# Altium PCB pmu.PcbDoc
Units mil, origin at the board's own origin, x right, y up, seen from the top; angles counter-clockwise.
Board outline 1870 x 900 mil, 2 copper layers (Top Layer, Bottom Layer); 14 components, 9 nets, 38 pads, 0 vias.
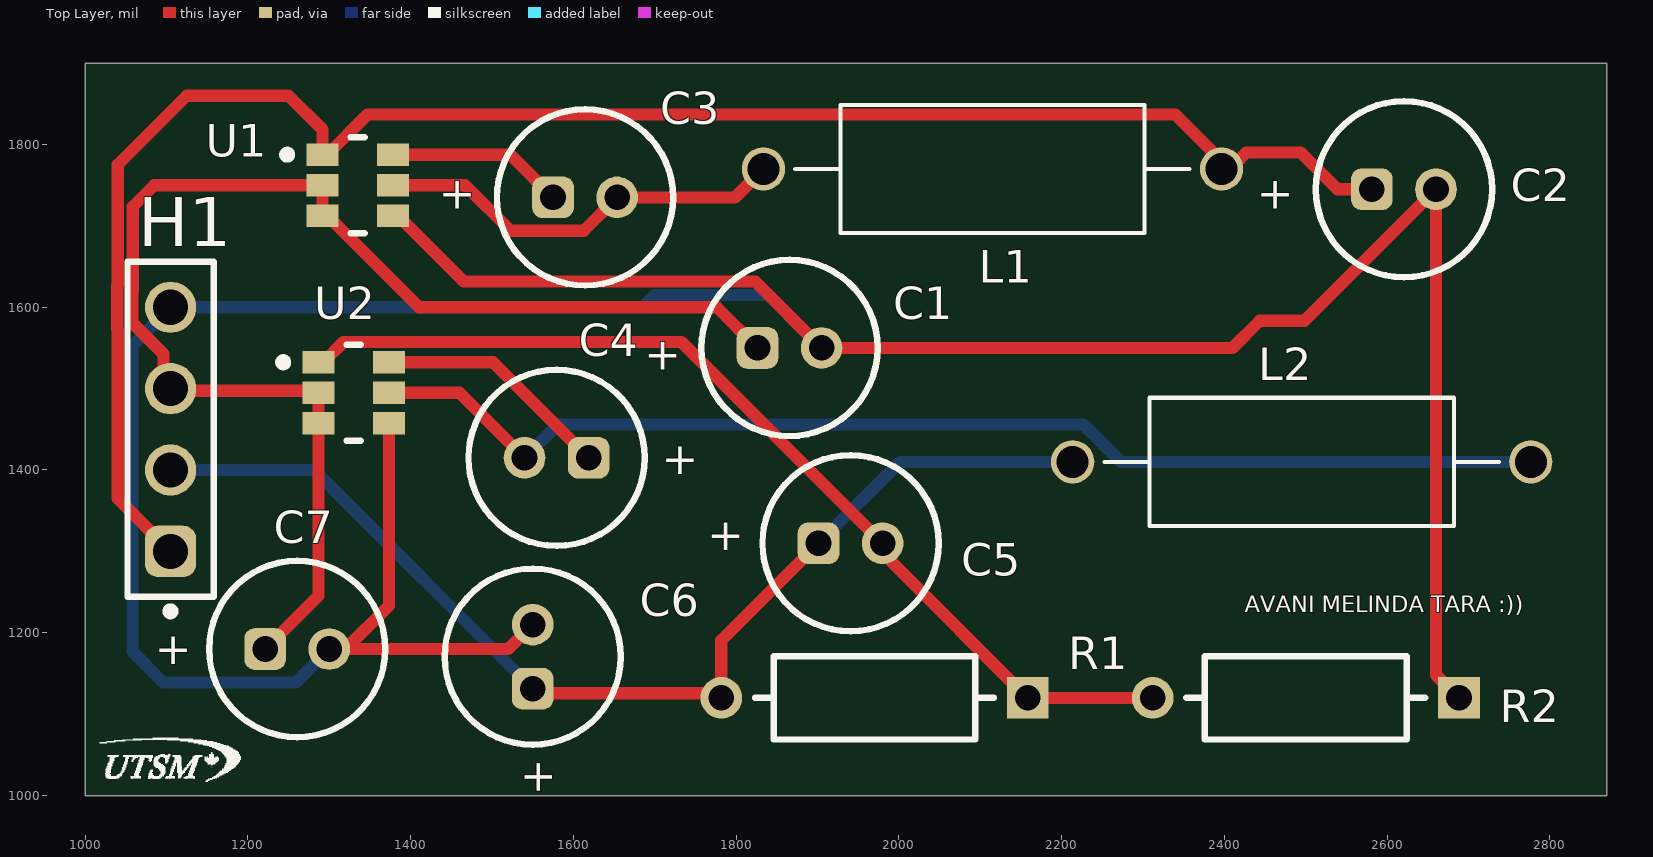
[diagram p0: Top Layer view]
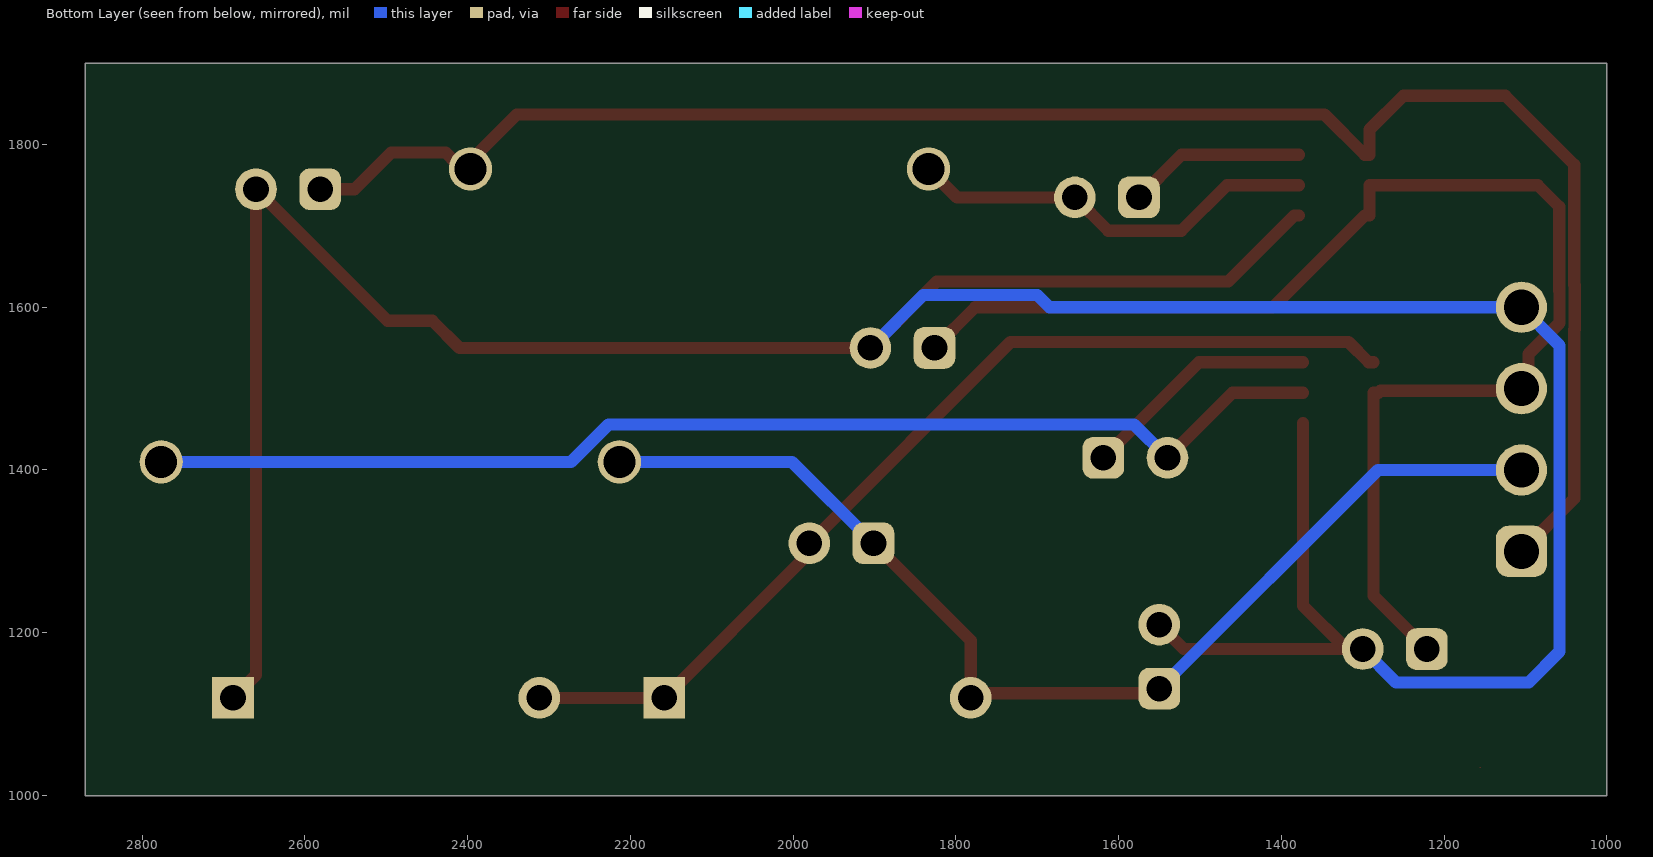
[diagram p1: Bottom Layer view, seen from below]

## Layer stack, top to bottom
Top Solder: solder mask 0.4, Solder Resist, Dk 3.5
Top Layer: signal copper 1.4
Dielectric 1: dielectric 12.6, FR-4, Dk 4.8
Bottom Layer: signal copper 1.4
Bottom Solder: solder mask 0.4, Solder Resist, Dk 3.5

## Board outline
1000,1000 2870,1000 2870,1900 1000,1900

## Design rules (kind name [scope] priority, off if disabled: settings)
BoardOutlineClearance [All] p1: gap=11.81 ignorepadtopadclearanceinfootprint=FALSE except(15.75: Arc-SplitBarrior Arc-SplitContinuation Track-SplitBarrior Track-SplitContinuation SMDPad-SplitBarrior SMDPad-SplitContinuation THPad-SplitBarrior THPad-SplitContinuation Via-SplitBarrior Via-SplitContinuation Fill-SplitBarrior Fill-SplitContinuation Poly-SplitBarrior Poly-SplitContinuation Region-SplitBarrior Region-SplitContinuation Text-SplitBarrior Text-SplitContinuation)
Clearance "Clearance Different Nets" [All] p1: gap=7.87 ignorepadtopadclearanceinfootprint=FALSE except(3.5: Arc-Arc Arc-Track Arc-SMDPad Track-Track Track-SMDPad; 5: SMDPad-SMDPad SMDPad-Via THPad-Via Via-Via; 10: Arc-Via Arc-Text Track-Via Track-Text SMDPad-Text THPad-Text Via-Text Fill-Text Poly-Text Region-Text Text-Text; 19.68: THPad-THPad Via-Hole)
Clearance "Clearance Same Nets" [All] p2: gap=7.87 ignorepadtopadclearanceinfootprint=FALSE except(3.5: Arc-Arc Arc-Track Arc-SMDPad Track-Track Track-SMDPad SMDPad-SMDPad; 5: SMDPad-Via THPad-Via; 10: Arc-Via Arc-Text Track-Via Track-Text SMDPad-Text THPad-Text Via-Via Via-Text Fill-Text Poly-Text Region-Text Text-Text)
Clearance "Clearance Bottom Layer" [OnLayer('Bottom Layer')] p3: gap=8 ignorepadtopadclearanceinfootprint=TRUE except(10: Arc-Text Track-Text SMDPad-Text THPad-Text Via-Text Fill-Text Poly-Text Region-Text Text-Text)
Clearance "Clearance Top Layer" [OnLayer('Top Layer')] p4: gap=8 ignorepadtopadclearanceinfootprint=TRUE except(10: Arc-Text Track-Text SMDPad-Text THPad-Text Via-Text Fill-Text Poly-Text Region-Text Text-Text)
HoleSize [All] p1: absolutevalues=TRUE maxlimit=248.03 minlimit=7.87 maxpercent=80.000 minpercent=20.000
MinimumAnnularRing [All] p1: minimumring=5.12
MinimumSolderMaskSliver [All] p1: minsoldermaskwidth=3.94
PolygonConnect PolygonConnect_1 [All] p1: thpad.connectstyle=Relief thpad.reliefconductorwidth=20 thpad.reliefentries=4 thpad.polygonreliefangle="90 Angle" thpad.airgapwidth=10 smdpad.connectstyle=Relief smdpad.reliefconductorwidth=20 smdpad.reliefentries=4 smdpad.polygonreliefangle="90 Angle" smdpad.airgapwidth=10 via.connectstyle=Direct via.reliefconductorwidth=20 via.reliefentries=4 via.polygonreliefangle="90 Angle" via.airgapwidth=10
RoutingCorners [All] p1: cornerstyle=Round minsetback=100 maxsetback=100
RoutingVias [All] p1: holewidth=19.68 width=39.37 viastyle="Through Hole" minholewidth=7.87 minwidth=13.78 maxholewidth=39.37 maxwidth=78.74
SilkToSilkClearance [All] p1: silktosilkclearance=3.94
SilkToSolderMaskClearance [IsPad] p1: minsilkscreentomaskgap=3.94 clearancetoexposedcopper=TRUE
SolderMaskExpansion [All] p1: expansion=4 istentingtop=FALSE
SupplyNets "Schematic Supply Nets" [InNet('GND')] p1: voltage=0.000
Width [All] p1: maxlimit=100 minlimit=3.5 preferedwidth=15
25 further rules are at their usual default settings.

## Components (designator, comment, footprint, x,y, rotation, side; value= is the part's Value field where it differs from the comment)
C1 "860020672005" WCAP-ATG5_D5H11 -48134.37,-48450 r180 top
C2 "860020672005" WCAP-ATG5_D5H11 -47379.37,-48255 r180 top
C3 "860020672005" WCAP-ATG5_D5H11 -48385.63,-48265 r180 top
C4 "860020672005" WCAP-ATG5_D5H11 51579.37,51415 r0 top
C5 "860020672005" WCAP-ATG5_D5H11 -48059.37,-48690 r180 top
C6 "860020672005" WCAP-ATG5_D5H11 51550,-48829.37 r270 top
C7 "860020672005" WCAP-ATG5_D5H11 -48739.37,-48820 r180 top
H1 "61300411121" 61300411121 1105,1450 r90 top locked
L1 "B78108E1472K009" INDAD1430W80L950D400 2115,1770 r0 top
L2 "B78108E1472K009" INDAD1430W80L950D400 2495,1410 r180 top
R1 "PCF14JT7K50" FP-CF14-MFG 1970,1120 r180 top
R2 "PCF14JT7K50" FP-CF14-MFG 2500,1120 r180 top
U1 "AP63205WU-7" FP-TSOT26-MFG 1335,1750 r0 top
U2 "AP63200WU-7" FP-TSOT26-MFG 1330,1495 r0 top

## Footprints (in the part's own frame and the unit in brackets; to place one, negate y for a bottom-side part, rotate by r counter-clockwise, add the part's x,y. Pads: shape width x height; smd on the part's side, far side on the other; paste and mask are expansions set on the pad)
61300411121 [mm] "Pin Header, pitch 2.54 mm, THT, Vertical, single row, 4p"
  rrect50% 1.6x1.6 hole 1.1: 1(-3.81,0)
  round 1.6 hole 1.1: 2(-1.27,0) 3(1.27,0) 4(3.81,0)
  silkscreen extent -5.8,-1.35 5.23,1.35, body extent -5.08,-1.27 5.08,1.27, height 8.57
FP-CF14-MFG [mm]
  rect 1.3x1.3 hole 0.8 paste-2539.97 mask+0: 1(-4.78,0)
  round 1.3 hole 0.8 paste-2539.97 mask+0: 2(4.78,0)
  silkscreen extent -3.73,-1.3 3.73,1.3, body extent -5.53,-1.4 5.53,1.4, height 0.25
FP-TSOT26-MFG [mm]
  rect 1x0.7 smd paste+0 mask+0: 1(-1.099,0.95) 2(-1.099,0) 3(-1.099,-0.95) 4(1.099,-0.95) 5(1.099,0) 6(1.099,0.95)
  silkscreen extent -2.32,-1.5 0.22,1.5, body extent -1.7,-1.6 1.7,1.6, height 0.25
INDAD1430W80L950D400 [mm]
  round 1.35 hole 1: 1(-7.15,0) 2(7.15,0)
  silkscreen extent -6.15,-2 6.15,2, body extent -7.55,-2 7.55,2, height 4
WCAP-ATG5_D5H11 [mm] "Aluminum Electrolytic Capacitors, 5x11mm"
  rrect50% 1.3x1.3 hole 0.8: 1(-1269,-1270)
  round 1.3 hole 0.8: 2(-1271,-1270)
  silkscreen extent -1272.75,-1272.75 -1267.25,-1267.25, body extent -1272.49,-1272.5 -1267.5,-1267.5, height 11.31

## Part data
C1 C2 C3 C4 C5 C6 C7: library part CMP-03913-53914228-1, "860020672005 WCAP-ATG5 Aluminum Electrolytic Capacitors", Capacitance=1µF, Case/Package=Radial, ESR (Equivalent Series Resistance)=39.553Ω, Leakage Current=3µA, Max Operating Temperature=105°C, Min Operating Temperature=-40°C, Ripple Current=13mA, Tolerance=20%, Voltage Rating=50V, Diameter=5mm, Height=11mm, Height - Seated (Max)=12.4968mm, Hole Diameter=800µm, Lead Pitch=2.0066mm, Length=11mm, Life (Hours)=2000hours, Mount="Through Hole", NexarPartId=53914228, Packaging="Tape & Box (TB)", Pitch=2mm, Polarity=Polar, REACH SVHC=Unknown, RoHS=Compliant, Voltage Rating (DC)=50V
H1: "WR-PHD Pin Header, THT, Vertical, pitch 2.54mm, 1 Row, 4P", Contact Resistance=20mOhm, Manufacturer="Wurth Elektronik", Operating Temperature Max=105°C, Operating Temperature Min=-40°C, Rated Current=3A, Withstanding Voltage=500V, Working Voltage=250V, Category="Board-to-Board Connectors", ComponentLink1Description="Website Link", ComponentLink1URL=https://www.we-online.com/redexpert/article/61300411121?ad, ComponentLink2Description="Datasheet Link", ComponentLink2URL=https://www.we-online.com/redexpert/spec/61300411121?ad, Gender="Pin Header", Manufacturer Part Number=61300411121, Match Code=WR-PHD, Mount="Through Hole", Number of Pins=4, Number of Rows=1, Orientation=Vertical, Packaging=Bag, Pitch=2.54mm
L1 L2: "4.7 ÂµH Unshielded Drum Core, Wirewound Inductor 2.75 A 85mOhm Max Axial", Package=None, Check_prices=https://www.snapeda.com/parts/B78108E1472K009/EPCOS/view-part/?ref=eda, Digi-Key_Part_Number=495-76025-1-ND, MF=EPCOS, MP=B78108E1472K009, Purchase-URL=https://pricing.snapeda.com/search/part/B78108E1472K009/?ref=eda, SnapEDA_Link=https://www.snapeda.com/parts/B78108E1472K009/EPCOS/view-part/?ref=snap
R1 R2: library part CMP-26528-000003-1, "RES 7.5K OHM 1/4W 5% AXIAL", Case/Package=Axial, Max Operating Temperature=155°C, Max Power Dissipation=250mW, Min Operating Temperature=-55°C, Resistance=7.5kR, Resistor Type="Carbon Film", Temperature Coefficient=-400ppm/°C, Tolerance=5%, Contact Plating=Tin, Diameter=2.3mm, Features="Flame Retardant Coating", Lead Free="Lead Free", Length=0.256inch, Mount="Through Hole", Number of Terminations=2, Packaging="Tape and Reel", Power Rating=250mW, Radiation Hardening=No, RoHS Compliant=Yes, Series=CF
U1: library part CMP-12757-000001-1, "IC REG BUCK 5V 2A TSOT26", Ambient Temperature Range High=+85°C, Ambient Temperature Range Low=-40°C, Manufacturer="Diodes Inc.", Max Junction Temp=+160°C, Max Supply Voltage=32V, Min Supply Voltage=3.8V, Nominal Supply Current=22uA, Output Current=2A, Output Voltage=5V, Package=TSOT26, Switching Frequency=1100kHz, Temperature="-40°C to +85°C", Automotive=No, Category=IC, ComponentLink2Description=Datasheet, ComponentLink2URL=https://www.diodes.com/assets/Datasheets/AP63200-AP63201-AP63203-AP63205.pdf, Device Class L1="Integrated Circuits (ICs)", Device Class L2="Power Management ICs", Device Class L3="Voltage Regulators - Switching", Digikey Description="IC REG BUCK 5V 2A TSOT26", Footprint Url=https://www.diodes.com/assets/Package-Files/TSOT26.pdf, Height=1mm, Lead Free=Yes, Manufacturer Part Number=AP63205WU-7, Max Duty Cycle=100%, Number Of Outputs=1, Octopart=https://octopart.com/ap63205wu-7-diodes+inc.-98099551, Output Type=Fixed, RoHS=TRUE, Standoff Height=0.01mm, Switching Topology=Buck, Temperature Range High=+85°C, Temperature Range Low=-40°C
U2: library part CMP-12757-000010-1, "IC REG BUCK ADJUSTABLE 2A TSOT26", Ambient Temperature Range High=+85°C, Ambient Temperature Range Low=-40°C, Manufacturer="Diodes Inc.", Max Junction Temp=+160°C, Max Supply Voltage=32V, Min Supply Voltage=3.8V, Nominal Supply Current=22uA, Output Current=2A, Package=TSOT26, Switching Frequency=500kHz, Temperature="-40°C to +85°C", Automotive=No, Category=IC, ComponentLink2Description=Datasheet, ComponentLink2URL=https://www.diodes.com/assets/Datasheets/AP63200-AP63201-AP63203-AP63205.pdf, Device Class L1="Integrated Circuits (ICs)", Device Class L2="Power Management ICs", Device Class L3="Voltage Regulators - Switching", Digikey Description="IC REG BUCK ADJUSTABLE 2A TSOT26", Footprint Url=https://www.diodes.com/assets/Package-Files/TSOT26.pdf, Height=1mm, Ipc Land Pattern Name=SOT95P280X100-6, Lead Free=Yes, Manufacturer Part Number=AP63200WU-7, Mouser Description="AP63200 Series 1.2 V 2 A Adjustable Synchronous Buck Converter - TSOT-26", Number Of Outputs=1, Octopart=https://octopart.com/ap63200wu-7-diodes+inc.-98099548, Output Type=AdjustableProgrammable, RoHS=TRUE, Standoff Height=0.01mm, Switching Topology=Buck, Temperature Range High=+85°C, Temperature Range Low=-40°C

## Nets (pads, with @x,y where several pads share a name; then routed paths per layer and width w, separated by ;. In a path a pad name is that pad's centre, name@x,y a point inside that pad or via, vN(x,y) a via of type N, cw(c..) or ccw(c..) an arc to the next point about the centre after c; other vN are vias at no path point)
GND: C1.2 C2.2 C6.2 C7.2 H1.4 R2.1 U1.4 U2.4 | length 4178.8
  Top Layer w15: C7.2 C7.2@1320,1180 ; U2.4 1373.29,1233.29 C7.2@1320,1180 ; U1.4 1384.19,1712.6 1465.17,1631.62 1823.38,1631.62 C1.2 2410,1550 2443.48,1583.48 2498.48,1583.48 2648.71,1733.71 2653.08,1738.08 C2.2 2660,1148.19 R2.1 ; C6.2 1520,1180 C7.2@1320,1180
  Bottom Layer w15: C7.2 1259.04,1139.04 1095.96,1139.04 1058.13,1176.87 1058.13,1553.13 H1.4 1685,1600 1700,1615 1840,1615 C1.2
NetC3_1: C3.1 U1.6 | length 218.4
  Top Layer w15: U1.6 1522.6,1787.4 C3.1
NetC3_2: C3.2 L1.1 U1.5 | length 509.9
  Top Layer w15: U1.5 1466.99,1750 1522.95,1694.04 1612.78,1694.04 C3.2 1798.5,1735 L1.1
NetC4_1: C4.1 U2.6 | length 294.1
  Top Layer w15: U2.6 1501.34,1532.4 C4.1
NetC4_2: C4.2 L2.1 U2.5 | length 1480.9
  Top Layer w15: U2.5 1460,1495 C4.2 ; L2.1@2770,1415 2775,1410 L2.1
  Bottom Layer w15: C4.2 1580.96,1455.96 2226.86,1455.96 2272.83,1410 L2.1
NetC5_2: C5.2 R1.1 R2.2 U2.1 | length 1223.4
  Top Layer w15: U2.1 1292.62,1532.4 1317.4,1557.18 1732.82,1557.18 C5.2 1980,1300.21 1990.72,1289.49 1990.72,1287.47 R1.1 R2.2
Vin: C1.1 C7.1 H1.3 U1.2 U1.3 U2.2 U2.3 | length 1652.5
  Top Layer w15: C7.1 1286.71,1245.45 U2.3 U2.2 1280.81,1495 1278.31,1497.5 1107.5,1497.5 1096.22,1508.78 1096.22,1542.5 1058.13,1580.59 1058.13,1619.41 1058.5,1619.78 1058.5,1723.5 1085,1750 U1.2 U1.3 1297.62,1712.6 1410.22,1600 1776.26,1600 C1.1
Vout_a: C2.1 H1.1 L1.2 U1.1 | length 2206
  Top Layer w15: H1.1 1040,1365 1040,1572.55 1039.63,1572.92 1039.63,1627.08 1040,1627.45 1040,1775 1125,1860 1250,1860 1291.71,1818.29 U1.1 1297.62,1787.4 1347.17,1836.95 2339.55,1836.95 2391.5,1785 L1.2@2396.5,1780 ; L1.2 L1.2@2396.5,1780 ; C2.1 2538.84,1745 2493.84,1790 2426.82,1790 2414.12,1777.3 2399.2,1777.3 L1.2@2396.5,1780
Vout_b: C5.1 C6.1 H1.2 L2.2 R1.2 | length 1384.3
  Top Layer w15: C6.1 1555.63,1125.63 1776.18,1125.63 R1.2@1779,1122.82 ; R1.2 R1.2@1779,1122.82 ; C5.1 1781.81,1190.55 1781.81,1125.63 R1.2@1779,1122.82
  Bottom Layer w15: H1.2 1281.26,1400 C6.1 ; C5.1 2001.26,1410 L2.2

## Other copper
Top Layer:
  region: 1156.12,1033.88 1155,1033.88 1155,1035 1156.12,1035

## Silkscreen, mask and mechanical layers (free items; w line width, h text height)
Top Overlay:
  drawing of 7 lines, arcs and shapes, not listed
  text "AVANI MELINDA TARA :))" at 2425,1225 h20

## Text inside footprints (layer, text, board x,y; h text height)
C1: Top Overlay "+" at 1732.82,1557.18 h39.37 r180
C2: Top Overlay "+" at 2485,1755 h39.37 r180
C3: Top Overlay "+" at 1480,1755 h39.37 r180
C4: Top Overlay "+" at 1708.74,1395 h39.37
C5: Top Overlay "+" at 1810,1335 h39.37 r180
C6: Top Overlay "+" at 1540,1045 h39.37 r270
C7: Top Overlay "+" at 1131.26,1195 h39.37 r180